# Altium PCB Copy of Emergency_Button_v2_0.PcbDoc
Units mil, origin at the board's own origin, x right, y up, seen from the top; angles counter-clockwise.
Board outline 2053 x 2085 mil, 2 copper layers (Top Layer, Bottom Layer); 41 components, 32 nets, 206 pads, 42 vias.
Unrouted connection lines stored in the file: 9.
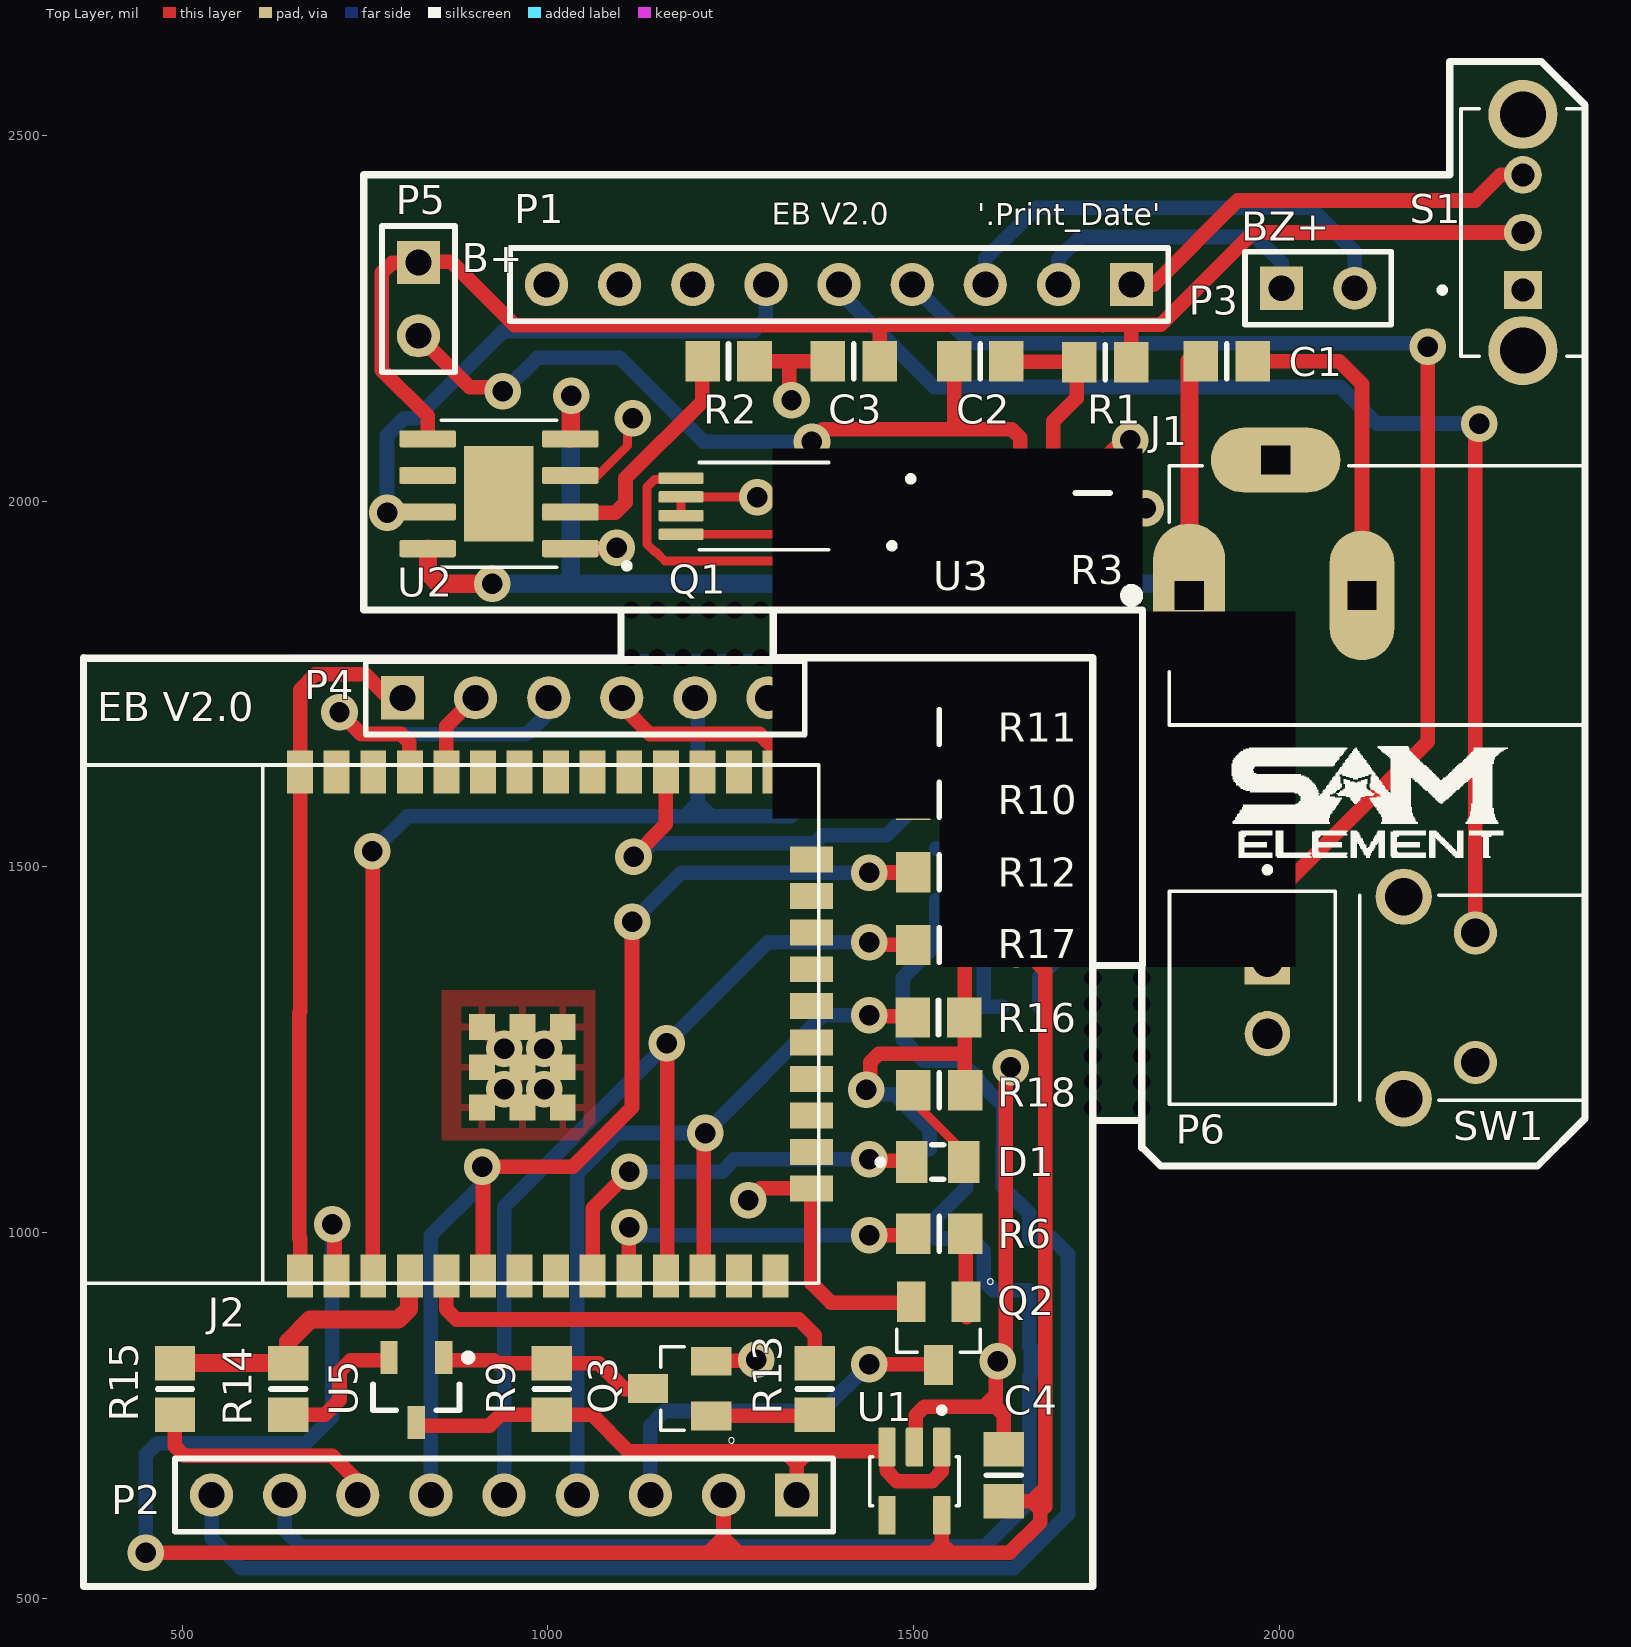
[diagram p0: Top Layer view]
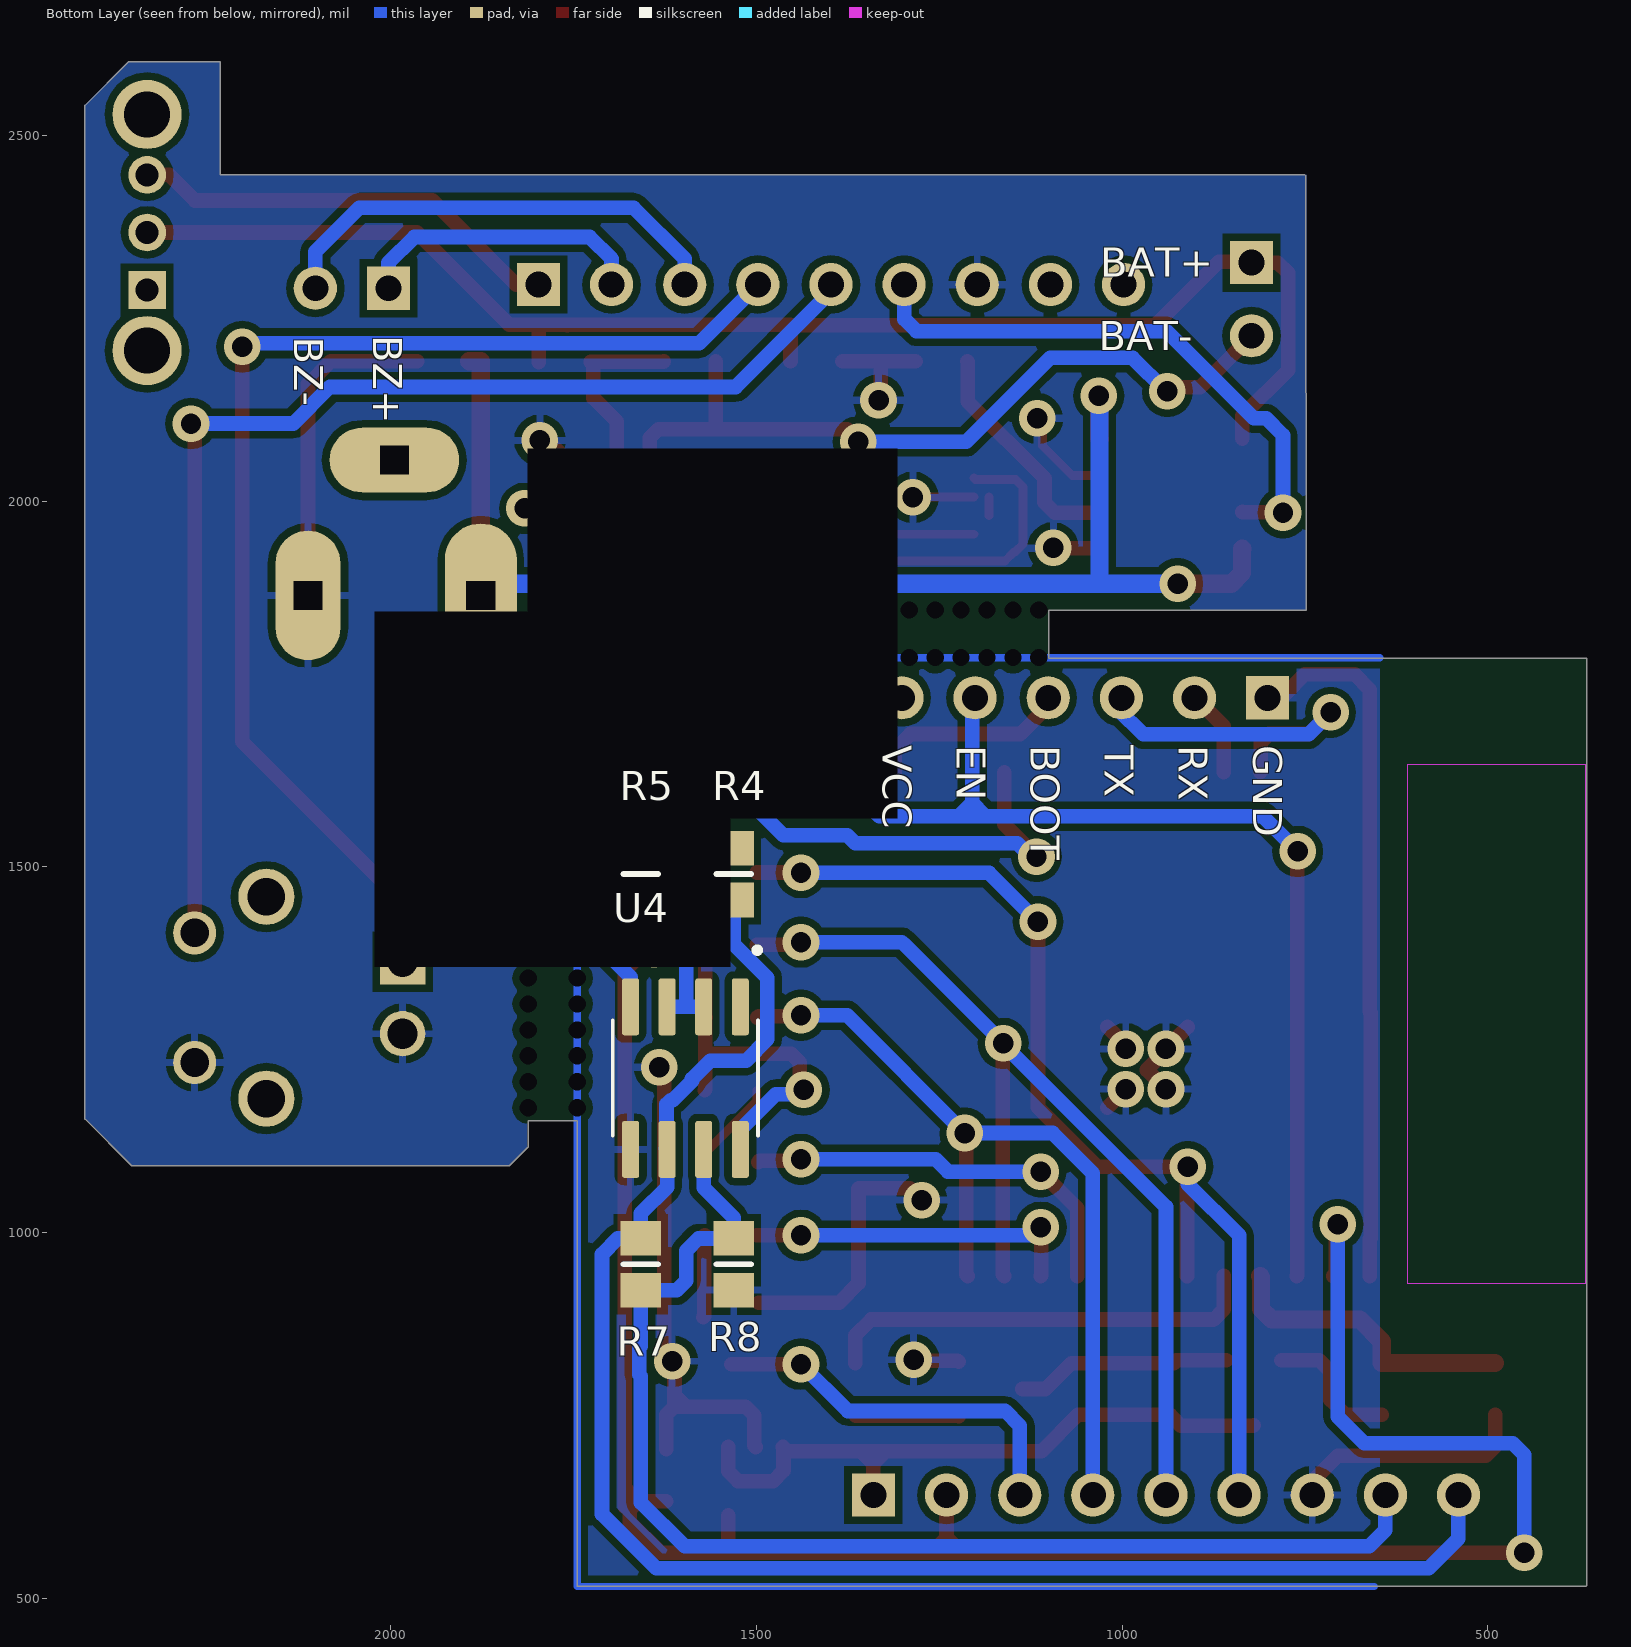
[diagram p1: Bottom Layer view, seen from below]

## Layer stack, top to bottom
Top Solder: solder mask 0.4, Solder Resist, Dk 3.5
Top Layer: signal copper 1.4
Dielectric 1: dielectric 12.6, FR-4, Dk 4.8
Bottom Layer: signal copper 1.4
Bottom Solder: solder mask 0.4, Solder Resist, Dk 3.5

## Board outline
749,2445 750,2446 2233,2446 2233,2601 2358,2601 2418,2541 2418,1155 2354,1091 1838,1091 1812,1117 1812,1153 1745,1153 1745,516 366,516 365,517 365,1785 1100,1785 1100,1851 748,1851

## Design rules (kind name [scope] priority, off if disabled: settings)
Clearance [All] p1: gap=10 ignorepadtopadclearanceinfootprint=TRUE except(0: Arc-Hole Track-Hole SMDPad-Hole THPad-Hole Via-Hole Fill-Hole Poly-Hole Region-Hole Text-Hole)
PolygonConnect [All] p1: connectstyle=Relief reliefconductorwidth=10 reliefentries=4 polygonreliefangle="90 Angle" airgapwidth=10
RoutingVias [All] p1: holewidth=28 width=50 viastyle="Through Hole" minholewidth=28 minwidth=50 maxholewidth=28 maxwidth=50
SolderMaskExpansion [All] p1: expansion=4
Width [All] p1: maxlimit=100 minlimit=5 preferedwidth=20 minimp=50.000000 maximp=50.000000 favimp=50.000000
30 further rules are at their usual default settings.

## Components (designator, comment, footprint, x,y, rotation, side; value= is the part's Value field where it differs from the comment)
C1 "C 100n" 6-0805_N 1928,2191 r180 top value=100n
C2 "C 100n" 6-0805_N 1591,2191 r0 top value=100n
C3 "C 100n" 6-0805_N 1418,2191 r0 top value=100n
C4 "C 100n" 6-0805_N 1623.23,668 r270 top value=100n
D1 "LED 0805" LEDC2012X70N 1533.03,1096.27 r0 top
J1 "PJ-002A" CUI_PJ-002A 1876.78,1871 r0 top
J2 "ESP32-WROOM-32E" ESP32-WROOM-32E 986.18,1284.94 r90 top
P1 "Header 9" HDR1X9 1798,2296 r180 top
P2 "Header 9" HDR1X9 1340,641 r180 top
P3 "Buzzer" HDR1X2 2003,2291 r0 top
P4 "Header 6" HDR1X6 801,1731 r0 top
P5 "BATT" HDR1X2 823,2326 r270 top
P6 "BTN" JST_B2B-XH-A(LF)(SN) 1963,1321 r90 top
Q1 "FS8205A" SOP65P640X120-8N 1295.41,1993 r180 top
Q2 "MMBT3904" SOT95P240X120-3N 1534,862.03 r180 top
Q3 "MMBT3904" SOT95P240X120-3N 1180,786.59 r90 top
R1 "R 100" 6-0805_N 1762,2190 r0 top value=100
R2 "R 1.2K" 6-0805_N 1247,2191 r0 top value=1.2K
R3 "R 1K" 6-0805_N 1745,2011 r90 top value=1K
R4 "R 10K" 6-0805_N 1531,1490 r90 bottom value=10K
R5 "R 10K" 6-0805_N 1658,1490 r270 bottom value=10K
R6 "R 1K" 6-0805_N 1535,998.36 r0 top value=1K
R7 "R 120" 6-0805_N 1658,956.43 r90 bottom value=120
R8 "R 10K" 6-0805_N 1531,956.43 r90 bottom value=10K
R9 "R 10K" 6-0805_N 1005,786 r270 top value=10K
R10 "R 10K" 6-0805_N 1535,1591.71 r0 top value=10K
R11 "R 10K" 6-0805_N 1535,1691 r0 top value=10K
R12 "R 10K" 6-0805_N 1535,1492.43 r0 top value=10K
R13 "R 1K" 6-0805_N 1364.67,786 r270 top value=1K
R14 "R 10K" 6-0805_N 645,786 r270 top value=10K
R15 "R 10K" 6-0805_N 490,786 r90 top value=10K
R16 "R 10K" 6-0805_N 1534,1293.86 r0 top value=10K
R17 "R 10K" 6-0805_N 1535,1393.14 r0 top value=10K
R18 "R 1K" 6-0805_N 1535,1194.57 r0 top value=1K
S1 "EG1247" SW_EG1247 2333,2367.26 r90 top
SW1 "1825027-5" SW_1825027-5 2268,1321 r90 top
U1 "AP2112K-3.3TRG1" SOT95P285X140-5N 1501,660 r270 top
U2 "TP4056" SOP127P600X175-9N 933,2010 r180 top
U3 "DW01A" SOT95P280X145-6N 1596.56,1993 r0 top
U4 "MAX3485ESA+" SOIC127P600X175-8N 1597,1211 r270 bottom
U5 "AO3401" SOT-23_N 820,784.69 r270 top

## Footprints (in the part's own frame and the unit in brackets; to place one, negate y for a bottom-side part, rotate by r counter-clockwise, add the part's x,y. Pads: shape width x height; smd on the part's side, far side on the other; paste and mask are expansions set on the pad)
6-0805_N [mm] "Chip Resistor, Body 2.0x1.2mm, IPC Medium Density"
  rect 1.2x1.4 smd: 1(-0.9,0) 2(0.9,0)
  silkscreen extent 0,-0.6 0,0.6, body extent -1.07,-0.7 1.07,0.7, height 0.7
CUI_PJ-002A [mm]
  oval 2.5x5 hole 1 square: 1(0,0)
  oval 2.25x4.5 hole 1 square: 2(6,0)
  oval 4.5x2.25 hole 1 square: 3(3,4.7)
  silkscreen extent -2.2,-4.5 13.7,4.5, body extent -0.7,-4.5 13.7,4.9, height 11
ESP32-WROOM-32E [mm]
  rect 1.5x0.9 smd: 1(-8.75,8.255) 2(-8.75,6.985) 3(-8.75,5.715) 4(-8.75,4.445) 5(-8.75,3.175) 6(-8.75,1.905) 7(-8.75,0.635) 8(-8.75,-0.635) 9(-8.75,-1.905) 10(-8.75,-3.175) 11(-8.75,-4.445) 12(-8.75,-5.715) 13(-8.75,-6.985) 14(-8.75,-8.255) 25(8.75,-8.255) 26(8.75,-6.985) 27(8.75,-5.715) 28(8.75,-4.445) 29(8.75,-3.175) 30(8.75,-1.905) 31(8.75,-0.635) 32(8.75,0.635) 33(8.75,1.905) 34(8.75,3.175) 35(8.75,4.445) 36(8.75,5.715) 37(8.75,6.985) 38(8.75,8.255)
  rect 0.9x1.5 smd: 15(-5.715,-9.505) 16(-4.445,-9.505) 17(-3.175,-9.505) 18(-1.905,-9.505) 19(-0.635,-9.505) 20(0.635,-9.505) 21(1.905,-9.505) 22(3.175,-9.505) 23(4.445,-9.505) 24(5.715,-9.505)
  rect 0.9x0.9 smd: GND@39(-2.9,1.935) GND@40(-1.5,1.935) GND@41(-0.1,1.935) GND@42(-2.9,0.535) GND@43(-1.5,0.535) GND@44(-0.1,0.535) GND@45(-2.9,-0.865) GND@46(-1.5,-0.865) GND@47(-0.1,-0.865)
  Keep-Out Layer region: 9,9.555 -9,9.555 -9,15.745 9,15.745
  silkscreen extent -9,-9.75 9,15.75, body extent -9,-9.83 9,15.67, height 3.25
HDR1X2 [mm] "Connector; Header; 2 Position"
  rect 1.5x1.5 hole 0.9: 1(0,0)
  round 1.5 hole 0.9: 2(2.54,0)
  silkscreen extent -1.27,-1.27 3.81,1.27
HDR1X6 [mm] "Connector; Header; 6 Position"
  rect 1.5x1.5 hole 0.9: 1(0,0)
  round 1.5 hole 0.9: 2(2.54,0) 3(5.08,0) 4(7.62,0) 5(10.16,0) 6(12.7,0)
  silkscreen extent -1.27,-1.27 13.97,1.27
HDR1X9 [mm] "Connector; Header; 9 Position"
  rect 1.5x1.5 hole 0.9: 1(0,0)
  round 1.5 hole 0.9: 2(2.54,0) 3(5.08,0) 4(7.62,0) 5(10.16,0) 6(12.7,0) 7(15.24,0) 8(17.78,0) 9(20.32,0)
  silkscreen extent -1.27,-1.27 21.59,1.27
JST_B2B-XH-A(LF)(SN) [mm]
  rect 1.575x1.575 / inner round 1.575 / far side rect 1.575x1.575 hole 1.05: 1(1.25,-0.525)
  round 1.575 hole 1.05: 2(-1.25,-0.525)
  silkscreen extent -3.7,-2.88 4.54,2.88, body extent -3.7,-2.88 3.7,2.88, height 7
LEDC2012X70N [mm]
  rect 1.1x1.45 smd: A(0.9,0) C(-0.9,0)
  silkscreen extent -2.1,-0.6 0.2,0.6, body extent -1,-0.63 1,0.63, height 0.7
SOIC127P600X175-8N [mm]
  rrect25% 1.97x0.59 smd: 1(-2.475,1.905) 2(-2.475,0.635) 3(-2.475,-0.635) 4(-2.475,-1.905) 5(2.475,-1.905) 6(2.475,-0.635) 7(2.475,0.635) 8(2.475,1.905)
  silkscreen extent -4.54,-2.52 2,2.59, body extent -3,-2.45 3,2.45, height 1.75
SOP65P640X120-8N [mm]
  rrect25% 1.56x0.4 smd: 1(-2.88,0.975) 2(-2.88,0.325) 3(-2.88,-0.325) 4(-2.88,-0.975) 5(2.88,-0.975) 6(2.88,-0.325) 7(2.88,0.325) 8(2.88,0.975)
  silkscreen extent -4.54,-1.52 2.25,1.52, body extent -3.2,-1.46 3.2,1.47, height 1.2
SOP127P600X175-9N [mm]
  rrect25% 1.97x0.6 smd: 1(-2.475,1.905) 2(-2.475,0.635) 3(-2.475,-0.635) 4(-2.475,-1.905) 5(2.475,-1.905) 6(2.475,-0.635) 7(2.475,0.635) 8(2.475,1.905)
  rect 2.413x3.302 smd paste-3: 9(0,0)
  silkscreen extent -4.54,-2.55 2,2.6, body extent -3,-2.45 3,2.45, height 1.75
SOT95P240X120-3N [mm]
  rect 1x1.4 smd: 1(-0.95,-1.1) 2(0.95,-1.1) 3(0,1.1)
  silkscreen extent -1.9,-1.9 1.45,0.65
SOT95P280X145-6N [mm]
  rect 1.21x0.59 smd: 1(-1.255,0.95) 2(-1.255,0) 3(-1.255,-0.95) 4(1.255,-0.95) 5(1.255,0) 6(1.255,0.95)
  silkscreen extent -2.65,0.85 -2.46,1.05, body extent -1.4,-1.45 1.4,1.45, height 1.45
SOT95P285X140-5N [mm]
  rrect15% 1.35x0.6 smd: 1(-1.185,0.95) 2(-1.185,0) 3(-1.185,-0.95) 4(1.185,-0.95) 5(1.185,0.95)
  silkscreen extent -2.57,-1.55 0.85,1.55, body extent -1.4,-1.5 1.4,1.5, height 1.4
SOT-23_N [mm] "SOT23, 3-Leads, Body 2.9x1.3mm, Pitch 0.95mm, Lead Span 2.5mm, IPC Medium Density"
  rect 1.15x0.6 smd: 1(-1.125,0.95) 2(-1.125,-0.95) 3(1.125,0)
  silkscreen extent -1.25,-1.5 0.7,1.93, body extent -0.7,-1.5 0.7,1.5, height 1.1
SW_1825027-5 [mm]
  round 1.498 hole 0.99: 1(-2.25,0) 2(2.25,0)
  round 1.95 hole 1.3: S1(-3.505,2.49) S2(3.505,2.49)
  silkscreen extent -3.55,-3.86 3.55,4.01, body extent -4.2,-5.98 4.2,3.87, height 7.26
SW_EG1247 [mm]
  rect 1.308x1.308 / inner round 1.308 / far side rect 1.308x1.308 hole 0.8: 1(-2,0)
  round 1.308 hole 0.8: 2(0,0) 3(2,0)
  round 2.4 hole 1.6: SH1(-4.1,0) SH2(4.1,0)
  silkscreen extent -4.3,-2.15 4.3,2.9, body extent -4.3,-6.15 4.3,2.15, height 4.7

## Part data
C1 C2 C3 C4: library part Cap, "Capacitor", LatestRevisionDate=17-Jul-2002, LatestRevisionNote="Re-released for DXP Platform.", PackageDescription="Radial Cap, Thru-Hole; 2 Leads; 0.3 in Pin Spacing", PackageReference=RAD-0.3, Published=8-Jun-2000, Publisher="Altium Limited"
D1: library part 597-3305-607F, "LED Uni-Color Green 4-Pin Chip 0805 T/R", Package=None, Availability=Unavailable, MP=597-3305-607F, Price=None
J1: "2.0 x 6.5 mm, 2.5 A, Horizontal, Through Hole, Dc Power Jack Connector", Package=None, Availability="In Stock", Check_prices=https://www.snapeda.com/parts/PJ-002A/CUI+Devices/view-part/?ref=eda, CUI_purchase_URL=https://www.cuidevices.com/product/interconnect/connectors/dc-power-connectors/jacks/pj-002a?utm_source=snapeda.com&utm_medium=referral&utm_campaign=snapedaBOM, MF="CUI Devices", MP=PJ-002A, Price=None, Purchase-URL=https://pricing.snapeda.com/search/part/PJ-002A/?ref=eda, SnapEDA_Link=https://www.snapeda.com/parts/PJ-002A/CUI+Devices/view-part/?ref=snap
J2: "RX TXRX MOD WIFI TRACE ANT SMD", Package="SMD-44 Espressif Systems", Availability="In Stock", Check_prices=https://www.snapeda.com/parts/ESP32-WROOM-32E/Espressif+Systems/view-part/?ref=eda, MF="Espressif Systems", MP=ESP32-WROOM-32E, Price=None, SnapEDA_Link=https://www.snapeda.com/parts/ESP32-WROOM-32E/Espressif+Systems/view-part/?ref=snap
P1 P2: "Header, 9-Pin", LatestRevisionDate=17-Jul-2002, LatestRevisionNote="Re-released for DXP Platform.", Publisher="Altium Limited"
P3 P5 P6: library part "Header 2", "Header, 2-Pin", LatestRevisionDate=17-Jul-2002, LatestRevisionNote="Re-released for DXP Platform.", Publisher="Altium Limited"
P4: "Header, 6-Pin", LatestRevisionDate=17-Jul-2002, LatestRevisionNote="Re-released for DXP Platform.", Publisher="Altium Limited"
Q1: "N/A", Package=Package, Availability="Not in stock", Check_prices=https://www.snapeda.com/parts/FS8205A/Fortune+Semiconductor/view-part/?ref=eda, MF="Fortune Semiconductor", MP=FS8205A, Price=None, SnapEDA_Link=https://www.snapeda.com/parts/FS8205A/Fortune+Semiconductor/view-part/?ref=snap
Q2 Q3: "Bipolar _BJT_ Transistor NPN 40V 200mA 270MHz 350mW Surface Mount SOT-23-3", Package="SOT-23-3 Taiwan Semiconductor", Availability=Unavailable, MF=STMicroelectronics, MP=MMBT3904, Price=None, SnapEDA_Link=https://www.snapeda.com/parts/MMBT3904/STMicroelectronics/view-part/2875870/?ref=snap
R1 R2 R3 R4 R5 R6 R7 R8 R9 R10 R11 R12 R13 R14 R15 R16 R17 R18: library part Res1, "Resistor", LatestRevisionDate=17-Jul-2002, LatestRevisionNote="Re-released for DXP Platform.", PackageDescription="Axial Device, Thru-Hole; 2 Leads; 0.3 in Pin Spacing", PackageReference=AXIAL-0.3, Published=8-Jun-2000, Publisher="Altium Limited"
S1: "Slide Switch SPDT Through Hole, Right Angle", Package=None, Availability="In Stock", Check_prices=https://www.snapeda.com/parts/EG1247/E-Switch/view-part/?ref=eda, MF=E-Switch, MP=EG1247, Price=None, Purchase-URL=https://pricing.snapeda.com/search/part/EG1247/?ref=eda, SnapEDA_Link=https://www.snapeda.com/parts/EG1247/E-Switch/view-part/?ref=snap
SW1: "Switch Tactile OFF (ON) SPST Round Button PC Pins 0.05A 24VDC 1.57N Thru-Hole Loose Piece", Package=None, Check_prices=https://www.snapeda.com/parts/1825027-5/TE+Connectivity+ALCOSWITCH+Switches/view-part/?ref=eda, Digi-Key_Part_Number=450-1662-ND, EU_RoHS_Compliance=Compliant, MF="TE Connectivity", MP=1825027-5, Purchase-URL=https://pricing.snapeda.com/search/part/1825027-5/?ref=eda, SnapEDA_Link=https://www.snapeda.com/parts/1825027-5/TE+Connectivity+ALCOSWITCH+Switches/view-part/?ref=snap
U1: "Linear Voltage Regulator IC Positive Fixed 1 Output 600mA SOT-25", Package="SOT-753 Diodes Inc.", Availability="In Stock", Check_prices=https://www.snapeda.com/parts/AP2112K-3.3TRG1/Diodes+Inc./view-part/?ref=eda, MF="Diodes Inc.", MP=AP2112K-3.3TRG1, Price=None, Purchase-URL=https://pricing.snapeda.com/search/part/AP2112K-3.3TRG1/?ref=eda, SnapEDA_Link=https://www.snapeda.com/parts/AP2112K-3.3TRG1/Diodes+Inc./view-part/?ref=snap
U2: "Complete single cell Li-Ion battery with a constant current / constant voltage linear charger", Package=Package, Availability="Not in stock", Check_prices=https://www.snapeda.com/parts/TP4056/NanJing+Top+Power+ASIC+Corp./view-part/?ref=eda, MF="NanJing Top Power ASIC Corp.", MP=TP4056, Price=None, SnapEDA_Link=https://www.snapeda.com/parts/TP4056/NanJing+Top+Power+ASIC+Corp./view-part/?ref=snap
U3: "One Cell Lithium-ion/Polymer Battery Protection IC", Package="SOT-23-6 Fortune Semiconductor", Check_prices=https://www.snapeda.com/parts/DW01A/Fortune+Semiconductor/view-part/?ref=eda, MF="Fortune Semiconductor", MP=DW01A, SnapEDA_Link=https://www.snapeda.com/parts/DW01A/Fortune+Semiconductor/view-part/?ref=snap
U4: "1/1 Transceiver Half RS422, RS485 8-SOIC", Package="SOIC-8 Maxim", Availability=Unavailable, MF="Maxim Integrated", MP=MAX3485ESA+, Price=None, SnapEDA_Link=https://www.snapeda.com/parts/MAX3485ESA%2B/Maxim%20Integrated/view-part/225576/?ref=snap
U5: "P-Channel 30V 4A (Ta) 1.4W (Ta) Surface Mount SOT-23-3L", Package="SOT-23-3 Alpha &amp; Omega Semiconductor", Arrow_Electronics-Purchase-URL=https://snapeda.com/shop?store=Arrow+Electronics&id=4795619, Availability=Warning, BuyPart=https://www.snapeda.com/parts/AO3401/Alpha%20&%20Omega%20Semiconductor/view-part/4795619/?ref=eda, MF="Alpha & Omega Semiconductor", MP=AO3401, Price=None, SnapEDA_Link=https://www.snapeda.com/parts/AO3401/Alpha%20&%20Omega%20Semiconductor/view-part/4795619/?ref=snap

## Free pads (board coordinates)
  round 0 hole 23.62: 2(1113.83,1786) 2(1113.83,1851) 2(1149.27,1786) 2(1149.27,1851) 2(1184.7,1786) 2(1184.7,1851) 2(1220.13,1786) 2(1220.13,1851) 2(1255.57,1786) 2(1255.57,1851) 2(1291,1786) 2(1291,1851) 2(1745,1170.7) 2(1745,1206.13) 2(1745,1241.57) 2(1745,1277) 2(1745,1312.43) 2(1745,1347.87) 2(1812,1170.7) 2(1812,1206.13) 2(1812,1241.57) 2(1812,1277) 2(1812,1312.43) 2(1812,1347.87)
  round 0 hole 504.72 square: 3(1560,1819)
  round 0 hole 485.98 square: 3(1779,1606)

## Via types
v1: diameter 50, hole 28, Top Layer to Bottom Layer, 42 vias

## Nets (pads, with @x,y where several pads share a name; then routed paths per layer and width w, separated by ;. In a path a pad name is that pad's centre, name@x,y a point inside that pad or via, vN(x,y) a via of type N, cw(c..) or ccw(c..) an arc to the next point about the centre after c; other vN are vias at no path point)
+5: C1.2 J1.1 U2.4 U2.8 | length 1744.3
  Top Layer w25: U2.8 836,1934.56 836,1901.64 850.64,1887 v1(924,1887) ; U2.4 1030.53,2085 1031.22,2085.69 1031.22,2143.22 v1(1032,2144) ; J1.1@1879.67,1868.11 J1.1 1877,1871.22 1877,2191 C1.2
  Bottom Layer w25: v1(924,1887) 1032,1887 ; v1(1032,2144) 1031,2143 1031,1888 1032,1887 ; J1.1 1860.78,1887 1032,1887
B+: C3.2 P5.1 R1.2 S1.2 U2.5 | length 2008.8
  Top Layer w20: U2.5 835.56,2116.44 773,2179 773,2312 787,2326 P5.1 824,2327 868,2327 954.57,2240.43 1453.43,2240.43 ; C3.2 1453.43,2240.43 ; 1758.43,2240.57 1758,2241 ; R1.2 1797.43,2240.43 1798,2241 ; S1.2 1964.26,2367.26 1838,2241 1798,2241 ; 1453.43,2240.43 1454,2241 1758,2241 ; 1758,2241 1798,2241
B-: C2.1 P5.2 Q1.2 Q1.3 U3.6 | length 1200.3
  Top Layer w12: Q1.2 1408.8,1993 ; Q1.3@1408.8,2003.51 Q1.3 ; 1555.57,2099.43 1557,2098
  Top Layer w20: P5.2 893.26,2155.74 932.26,2155.74 v1(938,2150) ; 1340,2062 1340,2015.23 1362.23,1993 1408.8,1993 ; v1@1376,2098 1557,2098 1634.26,2098 1645.97,2086.28 U3.6 ; 1555.57,2099.43 C2.1
  Bottom Layer w20: v1(938,2150) 939.78,2150 985.78,2196 1098,2196 1213,2081 v1(1361,2081)
BAT_ADC: J2.4 R14.1 R15.2 | length 413.4
  Top Layer w25: R15.2 R14.1 645,851 675,881 795.36,881 810,895.64 810,939.27 J2.4
BAT_CHRG: J2.6 P1.6 P2.6 R12.1 U2.7 | length 2325.9
  Top Layer w20: v1(780,1984) 780.5,1984.5 835.06,1984.5 U2.7 ; J2.6 911.18,1066 910,1067.18 v1(910,1090) 1034,1090 1115,1171 v1(1115,1425) ; v1@1429,1492 1429.21,1492.21 1499.35,1492.21 R12.1
  Bottom Layer w20: v1(780,1984) 780,2090 803,2113 820,2113 939,2232 1281,2232 1298,2249 P1.6 ; P2.6 840,996 910,1066 v1(910,1090) ; v1(1115,1425) 1182,1492 v1@1429,1492
  other v1: 1439,1492
BAT_EN: J2.5 R13.1 | length 602
  Top Layer w20: J2.5 861.18,894.82 875,881 1343.28,881 1365,859.28 R13.1@1365,821.43
BTN_EM: J2.12 P1.4 P2.4 P6.1 R16.1 | length 2856.2
  Top Layer w20: J2.12 1213.09,942.36 1213.09,1134.09 v1(1215,1136) ; v1(1439,1297) 1440.57,1295.43 1497,1295.43 R16.1 ; P6.1 1983.67,1451.67 2203,1671 v1(2203,2211)
  Bottom Layer w20: P2.4 1040,1081 1095,1136 v1(1215,1136) 1376,1297 v1(1439,1297) ; P1.4 1578,2216 v1@2203,2216
BUZ2: P1.3 P2.3 P3.2 Q2.3 | length 1167.6
  Top Layer w20: v1(1439,820) Q2.3@1534,820
  Bottom Layer w20: P2.3 1140,736 1160,756 1375,756 v1(1439,820) ; P1.3 1598,2331 1668,2401 2043,2401 2103,2341 P3.2
BUZZ: J2.10 R6.1 | length 460.1
  Top Layer w20: v1(1111,1007) 1110.59,1006.59 1110.59,941.04 J2.10 ; v1@1435,996 R6.1@1499.57,996
  Bottom Layer w20: v1(1111,1007) 1122,996 v1@1435,996
  other v1: 1439,996
ESP_BOOT: J2.25 P4.4 R11.1 | length 493.7
  Top Layer w20: P4.4@1105,1736 1105,1716 1139.53,1681.47 1289.53,1681.47 1311.18,1659.82 J2.25 1369.43,1629.43 1431,1691 R11.1
ESP_EN: J2.3 P4.5 R10.1 | length 1524
  Top Layer w20: v1(760,1521) 760.59,1520.41 760.59,941.04 J2.3 ; v1@1429,1593 1429.64,1592.36 1498.92,1592.36 R10.1
  Bottom Layer w20: v1(760,1521) 808,1569 1205,1569 ; P4.5@1205,1736 1205,1569 ; v1@1435,1593 1429,1593 1356,1593 1332,1569 1205,1569
  other v1: 1439,1593
GND: C1.1 C3.1 C4.1 J1.2 J2.1 J2.15 J2.38 J2.GND@39 J2.GND@40 J2.GND@41 J2.GND@42 J2.GND@43 J2.GND@44 J2.GND@45 J2.GND@46 J2.GND@47 P1.7 P2.7 P4.1 P6.2 Q1.6 Q1.7 Q2.2 Q3.2 R2.2 R3.2 R8.1 R15.1 SW1.1 U1.2 U2.1 U2.3 U4.5 | length 3628.7
  Top Layer w12: U2.3 1068,2035 1108.73,2075.73 1108.73,2105.73 v1(1116,2113) ; Q1.7 Q1.6 ; Q1.6@1202.61,2005.8 1203.01,2005.4 1285.6,2005.4 v1(1286,2005)
  Top Layer w20: R15.1 490,708 503,695 705,695 740,660 P2.7 ; J2.1 661.18,991.18 660,992.36 660,1300.54 661.18,1301.72 J2.38 661.18,1742.18 682,1763 750,1763 777,1736 P4.1@805,1736 ; 910,1281 v1(940,1251) 940,1248.5 966.25,1222.25 v1(940,1196) ; v1(995,1196) 1020.24,1170.76 ; v1(995,1251) 995,1255.76 1020.24,1281 ; U2.1 1030.94,1935.5 1093.5,1935.5 v1(1094,1936) ; Q3.2@1223.31,823.4 1224.61,824.7 1283.7,824.7 v1(1285,826) ; v1(1274,1044) 1274.06,1044 1290.53,1060.47 1359.86,1060.47 J2.15 1360.39,930.61 1387,904 Q2.2@1496.6,904 ; R2.2 1330,2191 ; v1(1333,2138) 1330,2141 1330,2191 ; C3.1 1330,2191 ; U1.2 1502.81,708.46 1502.81,750.28 1514.53,762 1612,762 ; C4.1 1623.23,750.77 1612,762 ; v1(1633,1226) 1626,1219 1626,835 v1(1615,824) 1612,821 1612,762 ; R3.2 1748.94,2046.43 1779.76,2077.26 1790.26,2077.26 v1(1796,2083) ; C1.1 2082,2191 2113,2160 J1.2 J1.2@2113,1843.13
LED: D1.C J2.9 | length 555.4
  Top Layer w20: J2.9 1061.18,1033.18 v1(1111,1083) ; v1@1438,1100 1439.87,1098.13 1495.73,1098.13 D1.C
  Bottom Layer w20: v1(1111,1083) 1238,1083 1255,1100 v1@1435,1100
  other v1: 1439,1100
NetC2_2: C2.2 R1.1 U3.5 | length 349.5
  Top Layer w20: C2.2 1626.93,2190.5 1726.07,2190.5 R1.1 1723,2186.43 1723,2141 1691,2109 1691,2006.33 1679.28,1994.61 1647.59,1994.61 U3.5
NetD1_A: D1.A R18.1 | length 126.8
  Top Layer w12: R18.1 1499.57,1179.43 1568.46,1110.54 D1.A
NetQ1_1: Q1.1 Q1.8 | length 226.8
  Top Layer w12: Q1.8@1202.61,1954.61 Q1.1@1429.39,1954.61
NetQ2_1: Q2.1 R6.2 | length 112.5
  Top Layer w20: R6.2@1570.43,996 1571.42,995.02 1571.42,885.29 Q2.1@1572.4,884.31
NetQ3_1: Q3.1 R13.2 | length 142.5
  Top Layer w20: Q3.1@1223.31,748.6 1224.29,749.58 1364.02,749.58 R13.2@1365,750.57
NetQ3_3: Q3.3 R9.1 U5.1 | length 295.6
  Top Layer w20: U5.1@857.4,825.29 925.71,825.29 929.57,821.43 R9.1 1069.57,821.43 1105,786 Q3.3@1136.69,786
NetR2_1: R2.1 U2.2 | length 315.1
  Top Layer w20: U2.2@1033.44,1984 1092,1984 1106,1998 1106,2031 1211,2136 1211,2190.43 R2.1
NetR3_1: R3.1 U3.2 | length 479.5
  Top Layer w20: v1(1484,1985) 1492.12,1985 1498.5,1991.39 1545.54,1991.39 U3.2 ; R3.1 1794.45,1975.57 1808.88,1990 v1(1817,1990)
  Bottom Layer w20: v1(1484,1985) 1486.5,1987.5 1814.5,1987.5 v1(1817,1990)
NetR14_2: R14.2 U5.2 | length 191.2
  Top Layer w20: R14.2 694.57,750.57 715,771 715,809.58 730.71,825.29 U5.2@782.6,825.29
OC: Q1.5 U3.3 | length 601
  Top Layer w12: Q1.5@1202.61,2031.39 1200.9,2029.67 1145.84,2029.67 1135.32,2019.14 1135.32,1953.66 1135.32,1941.27 1136,1940.58 1145.84,1930.74 1147.26,1930.74 1160,1918 1533,1918 1547.16,1932.16 U3.3
OD: Q1.4 U3.1 | length 118.2
  Top Layer w12: Q1.4@1429.39,2031.39 1429.88,2030.89 1546.66,2030.89 U3.1
OUT+1: P1.1 P2.1 R9.2 S1.3 U1.1 U1.3 U5.3 | length 1487.6
  Top Layer w20: U5.3@820,736.71 820.71,736 920,736 934.57,750.57 R9.2 1060.43,750.57 1110,701 1338,701 ; P2.1 1340,699 1338,701 ; U1.3 U1.3@1463,706.06 ; U1.1 1538.4,673.4 1525.08,660.08 1477.15,660.08 1463,674.23 U1.3@1463,706.06 ; P1.1@1793,2296 P1.1 1828,2296 1943,2411 2268,2411 2303,2446 S1.3 ; 1338,701 1457.94,701 U1.3@1463,706.06
RS485_A: P1.9 P2.9 R4.1 R7.2 U4.6 | length 2280.4
  Bottom Layer w20: P2.9 540.53,640.47 540.53,581.47 581,541 644.64,541 1637,541 1711,615 1711,970.28 1689.28,992 1658.13,992 R7.2 1658,1026 1622,1062 U4.6 U4.6@1622.81,1114.37 ; R4.1 1531,1394.42 1485,1348.42 1485,1264 1514,1235 1563,1235 1588,1210 1588,1207.36 1614.36,1181 1617,1181 1622.81,1175.19 U4.6@1622.81,1114.37 ; U4.6@1623.61,1115.17 U4.6@1622.81,1114.37
RS485_B: P1.8 P2.8 R7.1 R8.2 U4.7 | length 1710.8
  Bottom Layer w20: P2.8 640,593 662,571 1598.15,571 1658,630.85 1658,803.36 1660,805.36 1660,842.64 1658,844.64 R7.1 1609,921 1596,934 1596,975 1579.13,991.87 R8.2 1531,1020 1572,1061 U4.7
RST_WIFI: J2.11 P1.5 P2.5 R17.1 SW1.2 | length 3082.8
  Top Layer w20: J2.11 1163.09,942.36 1163.09,1257.91 v1(1162.5,1258.5) ; v1@1426,1397 1429.43,1393.57 1499.14,1393.57 R17.1 ; SW1.2 2268,2101 v1(2273,2106)
  Bottom Layer w20: P2.5 940,1035 1162.5,1257.5 v1(1162.5,1258.5) 1298,1394 1301,1397 v1@1426,1397 ; P1.5 1398,2286 1528,2156 2083,2156 2133,2106 v1(2273,2106)
  other v1: 1439,1397
RX0: J2.34 P4.2 | length 124.7
  Top Layer w20: J2.34 861.18,1692.18 P4.2@905,1736
TX0: J2.35 P4.3 | length 491.1
  Top Layer w20: v1(715,1711) 744.53,1681.47 799.53,1681.47 810.59,1670.41 810.59,1630.02 J2.35
  Bottom Layer w20: v1(715,1711) 745,1681 971,1681 1005,1715 P4.3@1005,1736
TX2: J2.28 R5.1 U4.4 | length 1026.4
  Top Layer w20: v1(1117,1514) 1161.18,1558.18 J2.28
  Bottom Layer w20: v1(1117,1514) 1125.12,1514 1143.12,1532 1365,1532 1376,1543 1463,1543 1498,1578 1638,1578 1656,1560 1656,1527.43 R5.1 1661.43,1522 1700,1522 1719,1503 1719,1396 1672,1349 U4.4
VCC: C4.2 J2.2 P1.2 P2.2 P3.1 P4.6 R4.2 R5.2 R10.2 R11.2 R12.2 R16.2 R17.2 R18.2 U1.5 U4.2 U4.3 U4.8 | length 5030
  Top Layer w20: v1(450,562) 1240,562 ; v1(705,1011) 708.09,1007.91 708.09,943.54 J2.2 ; P2.2@1247.47,633.53 P2.2 1240,562 ; P4.6@1305,1736 1316,1747 1559,1747 1570,1736 1570,1691.43 R11.2 R10.2 R12.2 1570.43,1413 1577.49,1396.09 1583.51,1390.07 1636.93,1390.07 v1(1640,1387) ; v1(1435,1195) 1440.74,1200.74 1440.74,1232.5 1452.46,1244.21 1569.93,1244.21 ; U1.5 1538.4,563.4 1537,562 ; R18.2 1569.93,1195.07 1569.93,1244.21 ; R17.2 1569.93,1392.64 1569.93,1294.36 R16.2 1569.93,1293.36 1569.93,1244.21 ; C4.2 1672.43,632.57 1673,632 ; v1@1629.97,1383.11 1654.89,1383.11 1680,1358 1680,625 1673,632 ; 1240,562 1537,562 ; 1537,562 1631,562 1673,604 1673,632
  Bottom Layer w20: v1(450,562) 450,696.28 465.72,712 669,712 705,748 v1(705,1011) ; v1(1435,1195) 1440.74,1189.26 1473.46,1189.26 1522,1140.72 U4.8 ; R4.2 1532.43,1524 1572,1524 1596,1500 1596,1456 ; U4.2 1597,1308.44 ; U4.3 1597,1308.44 ; v1(1640,1387) 1635,1392 1596,1392 ; R5.2 1597.43,1454.57 1596,1456 ; P1.2 1698,2331 1728,2361 1968,2361 2003,2326 P3.1 ; 1596,1392 1596,1456 ; 1596,1392 1596,1309.44 1597,1308.44
pads on no net: J1.3 J2.7 J2.8 J2.13 J2.14 J2.16 J2.17 J2.18 J2.19 J2.20 J2.21 J2.22 J2.23 J2.24 J2.26 J2.27 J2.29 J2.30 J2.31 J2.32 J2.33 J2.36 J2.37 S1.1 S1.SH1 S1.SH2 SW1.S1 SW1.S2 U1.4 U2.6 U2.9 U3.4 U4.1
copper on no net: | length 3457.5
  Bottom Layer w10: 647.5,1786 1745,1786 1745,516 655,516

## Polygon pours and split planes (outlines as drawn)
GND on Bottom Layer "Bottom Layer-GND 1" (solid, pour order 0): 647.5,1786 647.5,516 1747.5,516 1745,1786
GND on Bottom Layer "Bottom Layer-GND" (solid, pour order 8): 748,2446 748,1851 1813,1851 1813,1116 1838,1091 2353,1091 2418,1156 2418,2541 2358,2601 2233,2601 2233,2446
no net on Bottom Layer "Bottom Layer-No Net" (solid, pour order 2): 2123.5,1058.5
GND on Top Layer "Top Layer-GND" (solid, pour order 6): 855,1331 1065,1331 1065,1126 855,1126
no net on Top Layer "Top Layer-No Net" (solid, pour order 4): 2431,521

## Other copper
Top Layer:
  region net OUT+1: 1340,670 1369.5,699.5 1310.5,699.5
  region net GND: 1612,791.5 1582.5,762 1612,762
  region net GND: 1580,764
  region net VCC: 1647.83,632.57 1677.33,603.07 1677.33,662.07
  region net VCC: 1538.4,588.37 1508.9,558.87 1567.9,558.87
  region net B+: 1373,2168.5
  region net VCC: 1222,579
  region net VCC: 1239.5,596.5 1210,567 1269,567
Bottom Layer:
  region net ESP_EN: 1205,1601 1174,1570 1234.5,1571.5

## Silkscreen, mask and mechanical layers (free items; w line width, h text height)
Top Overlay:
  drawing of 46 lines, arcs and shapes, not listed
  text "EB V2.0" at 1306,2378 h30
  text "'.Print_Date'" at 1587,2377 h30
  text "BZ+" at 1948,2356 h40
  text "B+" at 882,2313 h40
  text "EB V2.0" at 384,1699 h40
Bottom Overlay:
  text "BAT+" at 1030,2307 h40
  text "BZ+" at 2024,2227 h40 r90
  text "BZ-" at 2132,2225 h40 r90
  text "BAT-" at 1032,2206 h40
  text "GND" at 821,1666 h40 r90
  text "RX" at 922.2,1666 h40 r90
  text "TX" at 1023.4,1666 h40 r90
  text "BOOT" at 1124.6,1666 h40 r90
  text "EN" at 1225.8,1666 h40 r90
  text "VCC" at 1327,1666 h40 r90
Mechanical 1:
  lines w10: 1390,495 1390,591 1425,591 ; 1847,2497 1847,2345 1888,2345